# Altium PCB PCB1.PcbDoc
Units mil, origin at the board's own origin, x right, y up, seen from the top; angles counter-clockwise.
Board outline 3520 x 3190 mil, 2 copper layers (Top Layer, Bottom Layer); 34 components, 32 nets, 137 pads, 1 vias.
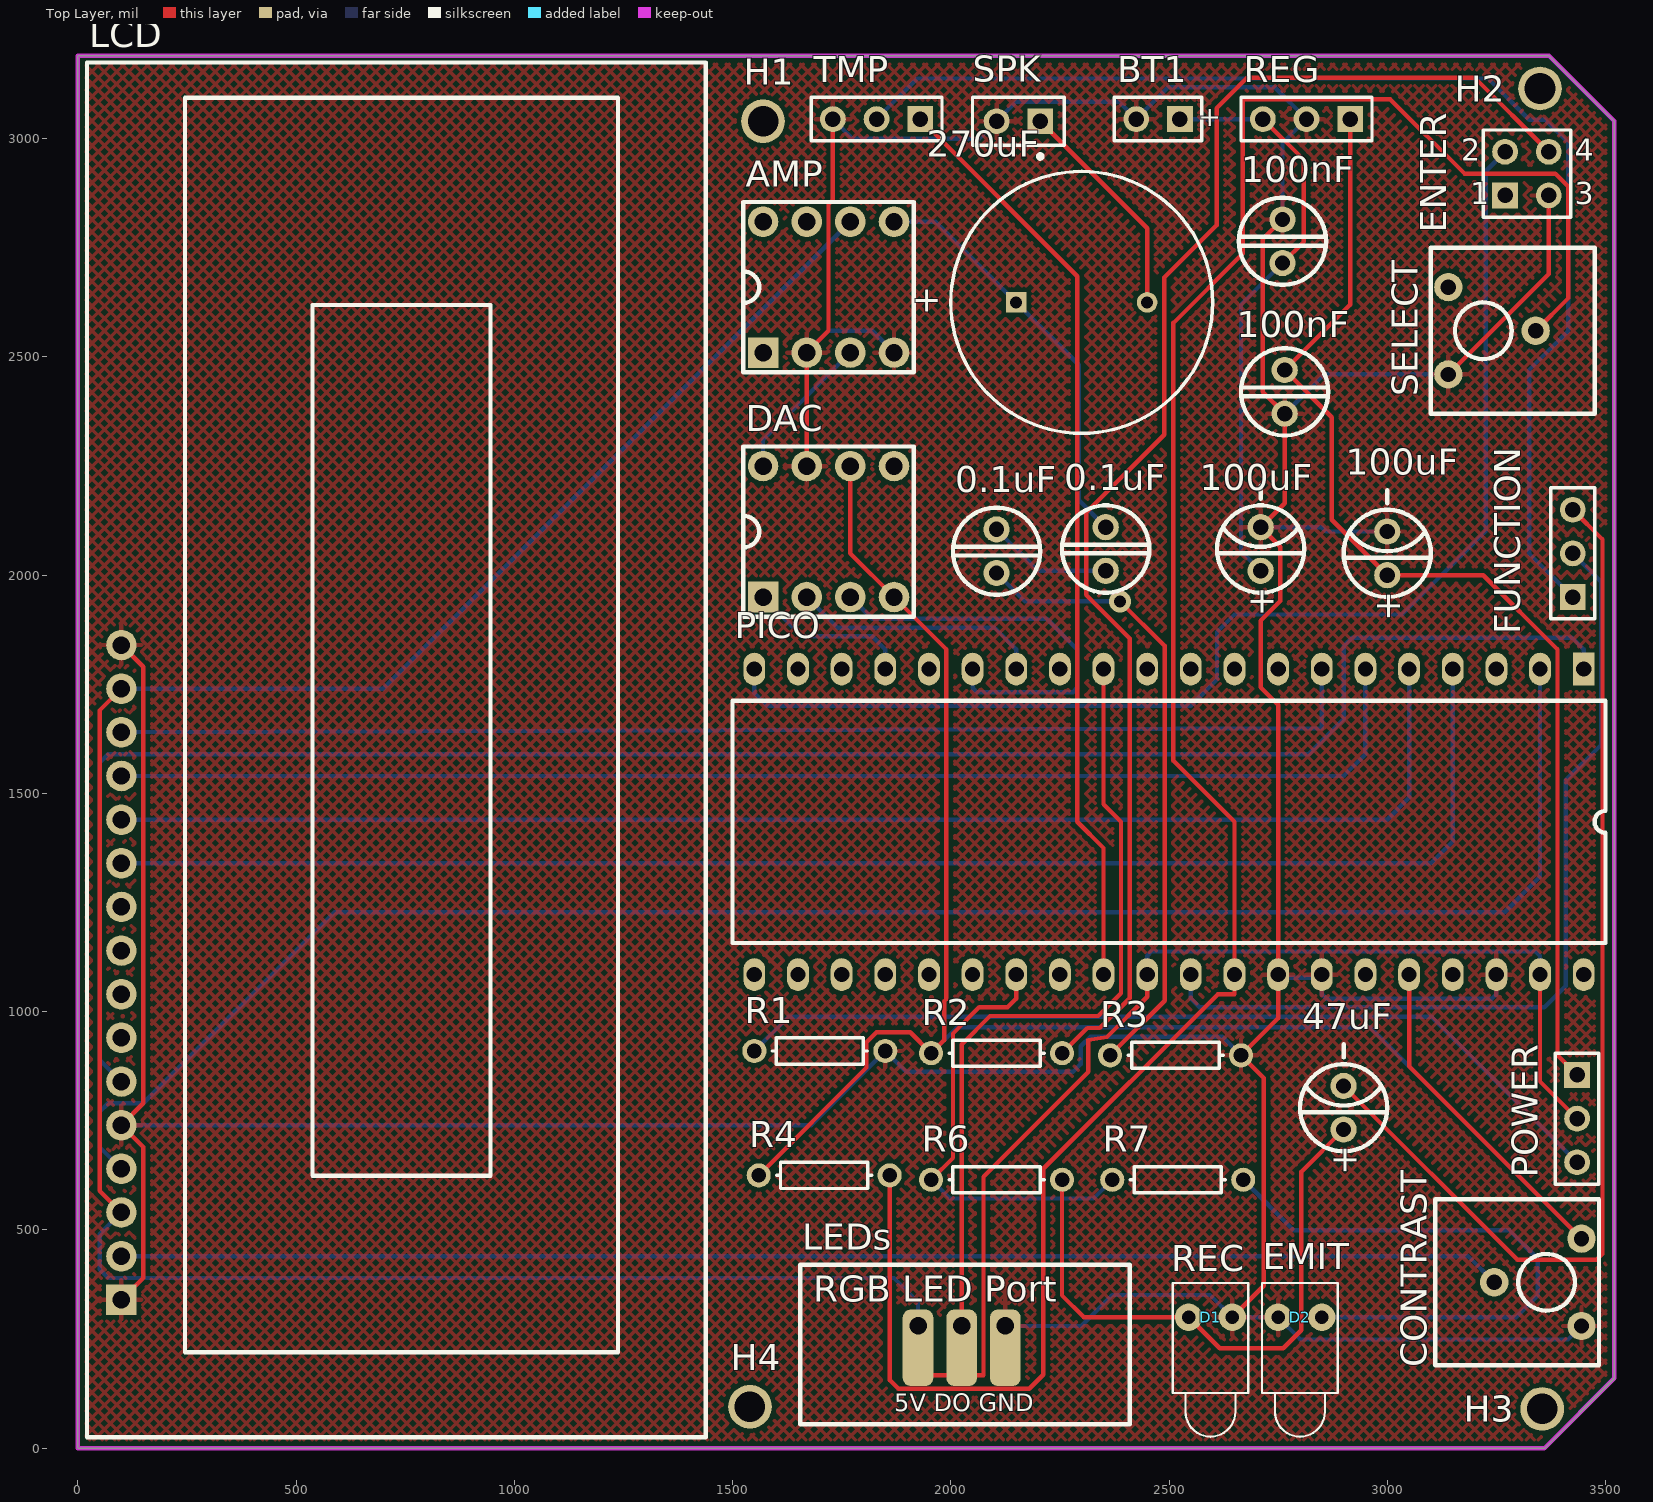
[diagram p0: Top Layer view]
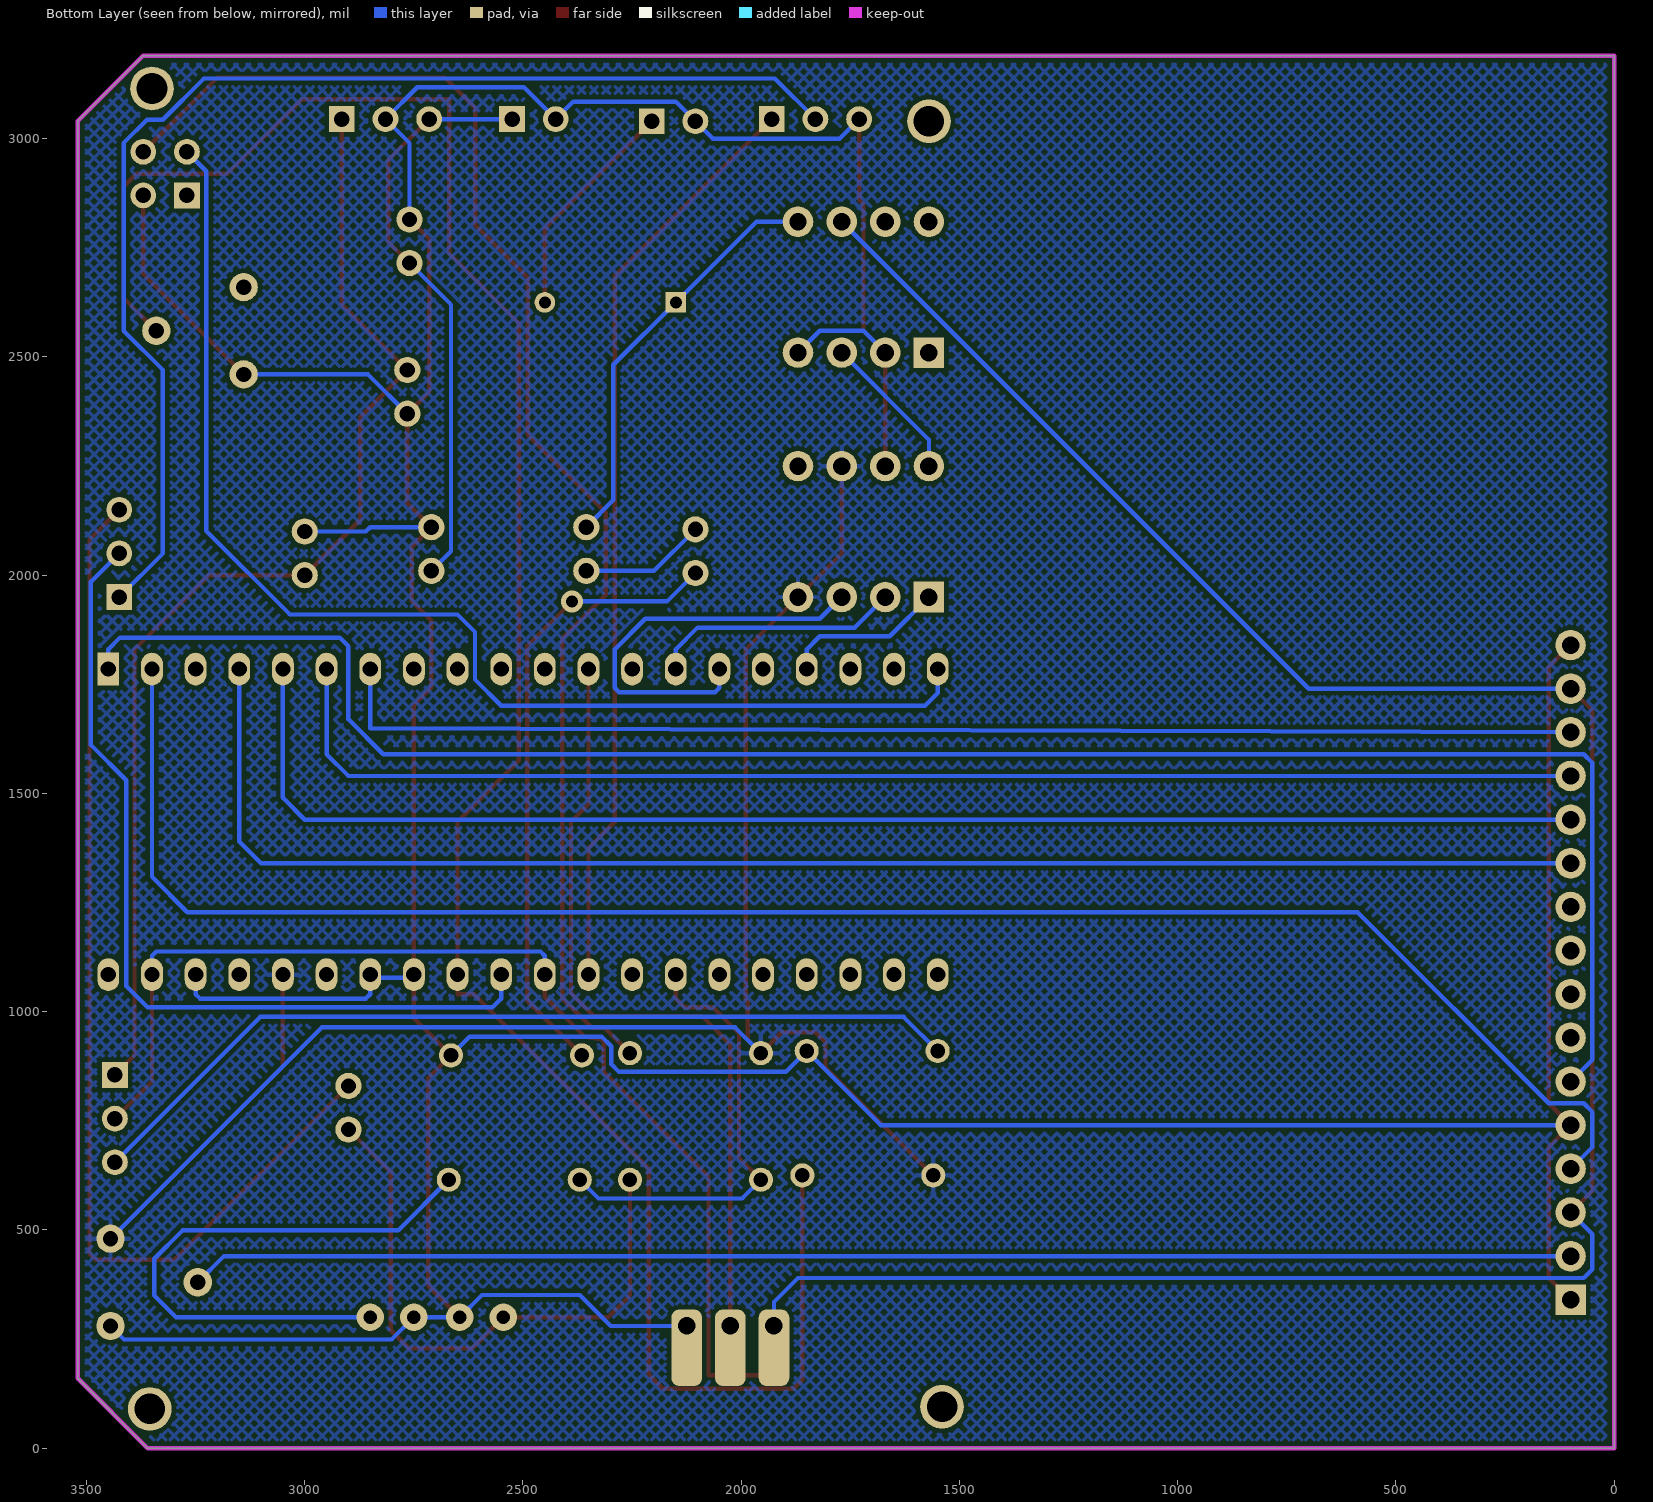
[diagram p1: Bottom Layer view, seen from below]

## Layer stack, top to bottom
Top Solder: solder mask 0.4, Solder Resist, Dk 3.5
Top Layer: signal copper 1.4
Dielectric 1: dielectric 12.6, FR-4, Dk 4.8
Bottom Layer: signal copper 1.4
Bottom Solder: solder mask 0.4, Solder Resist, Dk 3.5

## Board outline
0,0 0,3190 3370.63,3190 3520,3040.63 3520,160 3360,0

## Design rules (kind name [scope] priority, off if disabled: settings)
Clearance [All] p1: gap=10 ignorepadtopadclearanceinfootprint=FALSE except(0: Arc-Hole Track-Hole SMDPad-Hole THPad-Hole Via-Hole Fill-Hole Poly-Hole Region-Hole Text-Hole)
PolygonConnect [All] p1: connectstyle=Relief reliefconductorwidth=10 reliefentries=4 polygonreliefangle="90 Angle" airgapwidth=10
RoutingVias [All] p1: holewidth=28 width=50 viastyle="Through Hole" minholewidth=28 minwidth=50 maxholewidth=28 maxwidth=50
SolderMaskExpansion [All] p1: expansion=4 istentingtop=FALSE
Width [All] p1: maxlimit=10 minlimit=10 preferedwidth=10
30 further rules are at their usual default settings.

## Classes and differential pairs
component class Sheet2: 0.1uF 47uF 100nF 100uF 270uF AMP BT1 CONTRAST D1 D2 DAC ENTER FUNCTION H1 H2 H3 H4 LCD LEDs PICO POWER R1 R2 R3 R4 R6 R7 REG SELECT SPK TMP

## Components (designator, comment, footprint, x,y, rotation, side; value= is the part's Value field where it differs from the comment)
0.1uF "NP Cap" "NP Cap - Small" 2105,2105 r270 top (schematic designator 0.1uF_2)
0.1uF "NP Cap" "NP Cap - Small" 2355,2110 r270 top (schematic designator 0.1uF_1)
47uF "P Cap" "P Cap - Small" 2900,730 r90 top
100nF "NP Cap" "NP Cap - Small" 2765,2370 r90 top (schematic designator 100nF_2)
100nF "NP Cap" "NP Cap - Small" 2760,2815 r270 top (schematic designator 100nF_1)
100uF "P Cap" "P Cap - Small" 3000,2000 r90 top (schematic designator 100uF_2)
100uF "P Cap" "P Cap - Small" 2710,2010 r90 top (schematic designator 100uF_1)
270uF "Cap Pol1" RB7.6-15 2300,2625 r180 top value=270uF
AMP "LM386" 8DIP 1570,2510 r90 top
BT1 "Battery" BAT-2 2475,3045 r180 top
CONTRAST "RPot_3" "POT OFFSET 200" 3445,280 r90 top value=10K
D1 "REC" LED-1 2595,300 r270 top
D2 "EMIT" LED-1 2800,300 r270 top
DAC "LTC1661" 8DIP 1570,1950 r90 top
ENTER "BUTTON" HDR2X2 3270,2870 r0 top (schematic designator BUTTON)
FUNCTION "FUNC" HDR1X3 3425,1950 r90 top (schematic designator SWITCH2)
H1 "Hole 3mm" "Hole 3mm" 1960,2865 r0 top
H2 "Hole 3mm" "Hole 3mm" 3740,2940 r0 top
H3 "Hole 3mm" "Hole 3mm" 3530,480 r90 top
H4 "Hole 3mm" "Hole 3mm" 1930,-80 r0 top
LCD "LCD 44780" "OLED 16x2" 100,340 r90 top
LEDs "LEDs" "RGB LED Port" 1925,275 r0 top
PICO "Raspberry Pi Pico" "Raspberry Pi Pico" 3450,1785 r270 top
POWER "PWR" HDR1X3 3435,855 r270 top (schematic designator SWITCH1)
R1 "1K" AXIAL-0.3 1700,910 r180 top value=1k
R2 "Res1" AXIAL-0.3 2105,905 r180 top value=10K
R3 "Res1" AXIAL-0.3 2515,900 r180 top value=1K
R4 "Res1" AXIAL-0.3 1710,625 r0 top value=1MEG
R6 "10K" AXIAL-0.3 2105,615 r180 top value=10k
R7 "330" AXIAL-0.3 2520,615 r180 top
REG "VREG" HDR1X3 2915,3045 r180 top (schematic designator REGULATOR)
SELECT "RPot_3" "POT OFFSET 200" 3140,2660 r270 top value=10K (schematic designator R5)
SPK "Speaker" PIN2 2205,3040 r180 top
TMP "TMP" HDR1X3 1930,3045 r180 top

## Footprints (in the part's own frame and the unit in brackets; to place one, negate y for a bottom-side part, rotate by r counter-clockwise, add the part's x,y. Pads: shape width x height; smd on the part's side, far side on the other; paste and mask are expansions set on the pad)
8DIP [mil]
  rect 70x70 hole 40: 1(0,0)
  round 70 hole 40: 2(0,-100) 3(0,-200) 4(0,-300) 5(300,-300) 6(300,-200) 7(300,-100) 8(300,0)
  silkscreen extent -45,-345 345,45
AXIAL-0.3 [mm] "Axial Device, Thru-Hole; 2 Leads; 0.3 in Pin Spacing"
  round 1.4 hole 0.85: 1(-3.81,0) 2(3.81,0)
  silkscreen extent -2.77,-0.76 2.77,0.76
BAT-2 [mm] "Battery; 2 Leads"
  rect 1.5x1.5 hole 0.9: 1(-1.27,0)
  round 1.5 hole 0.9: 2(1.27,0)
  silkscreen extent -2.54,-1.27 2.54,1.27
HDR1X3 [mm] "Connector; Header; 3 Position"
  rect 1.5x1.5 hole 0.9: 1(0,0)
  round 1.5 hole 0.9: 2(2.54,0) 3(5.08,0)
  silkscreen extent -1.27,-1.27 6.35,1.27
HDR2X2 [mm] "Connector; Header; 2x2 Position"
  rect 1.5x1.5 hole 0.9: 1(0,0)
  round 1.5 hole 0.9: 2(0,2.54) 3(2.54,0) 4(2.54,2.54)
  silkscreen extent -1.27,-1.27 3.81,3.81
"Hole 3mm" [mil]
  round 100 hole 70: 1(-390,175)
LED-1 [mm] "LED; 2 Leads"
  round 1.6 hole 0.8: 1(0,1.27) 2(0,-1.27)
  silkscreen extent -2,-2.2 6.95,2.2
"NP Cap - Small" [mil]
  round 60 hole 35: 1(0,0) 2(100,0)
  silkscreen extent -50,-100 150,100
"OLED 16x2" [mil]
  rect 70x70 hole 40: 1(0,0)
  round 70 hole 40: 2(100,0) 3(200,0) 4(300,0) 5(400,0) 6(500,0) 7(600,0) 8(700,0) 9(800,0) 10(900,0) 11(1000,0) 12(1100,0) 13(1200,0) 14(1300,0) 15(1400,0) 16(1500,0)
  silkscreen extent -315,-1339 2835,79
"P Cap - Small" [mil]
  round 60 hole 35: 1(0,0) 2(100,0)
  silkscreen extent -50,-100 195,100
PIN2 [mm] "Photosensitive Diode; 2 Leads"
  rect 1.5x1.5 hole 0.9: 1(0,0)
  round 1.5 hole 0.9: 2(2.54,0)
  silkscreen extent -1.4,-1.4 3.94,2.17
"POT OFFSET 200" [mil]
  round 65 hole 35: 1(0,0) 2(100,200) 3(200,0)
  silkscreen extent -90,-40 290,335
"Raspberry Pi Pico" [mil]
  rect 75x50 hole 35: 1(0,0)
  oval 75x50 hole 35: 2(0,-100) 3(0,-200) 4(0,-300) 5(0,-400) 6(0,-500) 7(0,-600) 8(0,-700) 9(0,-800) 10(0,-900) 11(0,-1000) 12(0,-1100) 13(0,-1200) 14(0,-1300) 15(0,-1400) 16(0,-1500) 17(0,-1600) 18(0,-1700) 19(0,-1800) 20(0,-1900) 21(700,-1900) 22(700,-1800) 23(700,-1700) 24(700,-1600) 25(700,-1500) 26(700,-1400) 27(700,-1300) 28(700,-1200) 29(700,-1100) 30(700,-1000) 31(700,-900) 32(700,-800) 33(700,-700) 34(700,-600) 35(700,-500) 36(700,-400) 37(700,-300) 38(700,-200) 39(700,-100) 40(700,0)
  silkscreen extent 72,-1950 628,50
RB7.6-15 [mm] "Polarized Capacitor (Radial); 2 Leads"
  rect 1.2x1.2 hole 0.7: 1(3.81,0)
  round 1.2 hole 0.7: 2(-3.81,0)
  silkscreen extent -7.62,-7.62 7.62,7.62
"RGB LED Port" [mil]
  rrect50% 70x175 hole 40 copper offset 0,-50: 1(0,5) 2(100,5) 3(200,5)
  silkscreen extent -270,-220 485,145

## Part data
270uF: "Polarized Capacitor (Radial)", LatestRevisionDate=17-Jul-2002, LatestRevisionNote="Re-released for DXP Platform.", PackageDescription="Polarized Capacitor (Radial); 2 Leads", PackageReference=RB7.6-15, Published=8-Jun-2000, Publisher="Altium Limited"
BT1: "Multicell Battery", LatestRevisionDate=17-Jul-2002, LatestRevisionNote="Re-released for DXP Platform.", PackageDescription="Battery; 2 Leads", PackageReference=BAT-2, Published=24-Mar-1999, Publisher="Altium Limited"
CONTRAST SELECT: library part RPot, "Potentiometer", LatestRevisionDate=17-Jul-2002, LatestRevisionNote="Re-released for DXP Platform.", Published=8-Jun-2000, Publisher="Altium Limited", Set Position=0.5, Sim Note="Enter the Resistance value and the set point into parameter fields."
D1 D2: library part LED1, "Typical RED GaAs LED", LatestRevisionDate=08-Jul-2005, LatestRevisionNote="Mech Layer 1 removed.", PackageDescription="LED; 2 Leads", PackageReference=LED-1, Published=8-Jun-2000, Publisher="Altium Limited"
ENTER: library part "Header 2X2", "Header, 2-Pin, Dual row", LatestRevisionDate=17-Jul-2002, LatestRevisionNote="Re-released for DXP Platform.", Publisher="Altium Limited"
FUNCTION POWER REG TMP: library part "Header 3", "Header, 3-Pin", LatestRevisionDate=17-Jul-2002, LatestRevisionNote="Re-released for DXP Platform.", Publisher="Altium Limited"
LEDs: library part "RGB LED Header"
R1 R6 R7: library part Res1, "Resistor", LatestRevisionDate=17-Jul-2002, LatestRevisionNote="Re-released for DXP Platform.", PackageDescription="Axial Device, Thru-Hole; 2 Leads; 0.3 in Pin Spacing", PackageReference=AXIAL-0.3, Published=8-Jun-2000, Publisher="Altium Limited"
R2 R3 R4: "Resistor", LatestRevisionDate=17-Jul-2002, LatestRevisionNote="Re-released for DXP Platform.", PackageDescription="Axial Device, Thru-Hole; 2 Leads; 0.3 in Pin Spacing", PackageReference=AXIAL-0.3, Published=8-Jun-2000, Publisher="Altium Limited"
SPK: "Loudspeaker", LatestRevisionDate=17-Jul-2002, LatestRevisionNote="Re-released for DXP Platform.", PackageReference=PIN2, Published=24-Mar-1999, Publisher="Altium Limited"

## Via types
v1: diameter 50, hole 28, Top Layer to Bottom Layer, 1 vias

## Nets (pads, with @x,y where several pads share a name; then routed paths per layer and width w, separated by ;. In a path a pad name is that pad's centre, name@x,y a point inside that pad or via, vN(x,y) a via of type N, cw(c..) or ccw(c..) an arc to the next point about the centre after c; other vN are vias at no path point)
3V: CONTRAST.3 DAC.4 DAC.6 PICO.36 R2.2 R4.1 | length 4518.9
  Top Layer w10: R4.1 1807,872 1807,930 1830,953 1907,953 R2.2 1984.8,934.8 1984.8,1023.63 1990,1028.83 1990,1830 DAC.4 1770,2050 DAC.6 ; PICO.36 3050,875 CONTRAST.3
  Bottom Layer w10: R2.2 2014,964 2961,964 CONTRAST.3
5V: AMP.6 LCD.3 LCD.15 LEDs.1 PICO.30 PICO.39 POWER.2 | length 8181
  Top Layer w10: LCD.3 50,590 50,1690 LCD.15 ; LEDs.1 1925,167 2075,167 2075,622 2315,862 2315,935 2358,942 2450,1034 PICO.30 ; PICO.39 3350,840 POWER.2
  Bottom Layer w10: LCD.3 50,490 50,410 70,390 1870,390 1925,335 LEDs.1 ; LCD.15 700,1740 AMP.6 ; PICO.30 2450,1128 2460,1138 3340,1138 3350,1128 PICO.39
ADC_BOTH: FUNCTION.2 PICO.31 | length 1994.1
  Bottom Layer w10: PICO.31 2550,1030 2570,1010 3360,1010 3409,1059 3409,1530 3490,1611 3490,1985 FUNCTION.2
ADC_POT: PICO.32 R4.2 SELECT.2 | length 5281.4
  Top Layer w10: R4.2 1860,156 1880,136 2180,136 2212,168 2212,640 2612,1040 2650,1040 PICO.32 2650,1435 2510,1575 2510,2578 2669,2737 2669,3089 2670,3090 3007,3090 3177,2920 3385,2920 3415,2890 3415,2635 SELECT.2
DAC_CS: DAC.1 PICO.17 | length 374.7
  Bottom Layer w10: DAC.1 1660,1860 1820,1860 1850,1830 PICO.17
DAC_D: DAC.3 PICO.15 | length 949
  Bottom Layer w10: DAC.3 1820,1900 2220,1900 2290,1830 2290,1742 2280,1732 2060,1732 2050,1742 PICO.15
DAC_SCK: DAC.2 PICO.14 | length 574.7
  Bottom Layer w10: DAC.2 1740,1880 2100,1880 2150,1830 PICO.14
GND: 100nF.1 100uF.2 AMP.2 AMP.4 BT1.2 CONTRAST.1 D1.1 D2.2 DAC.7 ENTER.3 LCD.1 LCD.5 LCD.16 LEDs.3 PICO.33 PICO.34 PICO.38 R1.1 R3.1 REG.2 SELECT.3 SPK.2 TMP.3 | length 12783
  Top Layer w10: LCD.1 150,390 150,690 LCD.5 150,790 150,1790 LCD.16 ; DAC.7 AMP.2 1720,2560 1720,2850 1730,2860 TMP.3 ; D1.1 2717,372 2717,848 R3.1 2750,985 PICO.33 2750,1703 2710,1743 2710,1896 2755,1941 2755,2065 2710,2110 2765,2165 2765,2370 2715,2420 2715,2770 100nF.1@2760,2815 ; SELECT.3 3370,2690 ENTER.3
  Bottom Layer w10: LCD.5 1680,740 R1.1 1898,862 2280,862 2298,880 2298,921 2320,943 2622,943 R3.1 ; AMP.2 1720,2560 1820,2560 AMP.4 ; TMP.3 1775,3000 2065,3000 SPK.2 2150,3085 2385,3085 BT1.2 2498,3118 2742,3118 REG.2 2760,2990 100nF.1@2760,2815 ; LEDs.3 2299,280 2370,351 2594,351 D1.1 D2.2 2801,249 3414,249 CONTRAST.1 ; 100uF.2@2710,2110 2850,2110 2860,2100 100uF.2@3000,2100 ; PICO.33 2750,1077.5 PICO.34@2850,1077.5 ; 100nF.1@2765,2370 2855,2460 SELECT.3 ; PICO.34 PICO.34@2850,1077.5 ; PICO.38 3250,1040 3240,1030 2860,1030 2850,1040 PICO.34@2850,1077.5
HR_PWR: PICO.27 R6.2 R7.2 | length 1039.5
  Top Layer w10: R6.2 2005,665 2005,950 2065,1010 2130,1010 2150,1030 PICO.27
  Bottom Layer w10: R6.2 1998,572 2327,572 R7.2
LCD_E: LCD.6 PICO.1 | length 4423.6
  Bottom Layer w10: LCD.6 50,890 50,1570 70,1590 2820,1590 2900,1670 2900,1837 2920,1857 3423,1857 3450,1830 PICO.1
LCD_RS: LCD.4 PICO.2 | length 4150
  Bottom Layer w10: LCD.4 50,690 50,770 70,790 150,790 588,1228 3269,1228 3350,1309 PICO.2
LCD_VDD: CONTRAST.2 LCD.2 | length 3169.9
  Bottom Layer w10: LCD.2 3185,440 CONTRAST.2
Net0.1uF_1_1: 0.1uF.1@2355,2110 270uF.1 AMP.5 | length 956.5
  Bottom Layer w10: AMP.5 1965,2810 270uF.1 2293,2482 2293,2172 0.1uF.1@2355,2110
Net0.1uF_1_2: 0.1uF.1@2105,2105 0.1uF.2@2355,2010 | length 289.4
  Bottom Layer w10: 0.1uF.1@2105,2105 2200,2010 0.1uF.2@2355,2010
Net0.1uF_2_2: 0.1uF.2@2105,2005 R3.2 | length 1444
  Top Layer w10: R3.2 2490,1025 2490,1838 v1(2388,1940)
  Bottom Layer w10: 0.1uF.2@2105,2005 2170,1940 v1(2388,1940)
Net47uF_1: 47uF.1 D1.2 R6.1 | length 1380.3
  Top Layer w10: R6.1 2255,350 2305,300 D1.2 2616,229 2762,229 2803,270 2803,633 47uF.1
Net47uF_2: 47uF.2 FUNCTION.3 | length 2496.4
  Top Layer w10: 47uF.2 3298,432 3480,432 3493,445 3493,2082 FUNCTION.3
Net100nF_1_2: 100nF.2@2760,2715 100uF.1@2710,2010 BT1.1 REG.3 | length 1342.2
  Top Layer w10: REG.3 2809,2951 2809,2764 100nF.2@2760,2715
  Bottom Layer w10: BT1.1 REG.3 ; 100uF.1@2710,2010 2665,2055 2665,2620 100nF.2@2760,2715
Net100nF_2_2: 100nF.2@2765,2470 100uF.1@3000,2000 POWER.1 REG.1 | length 2658.5
  Top Layer w10: REG.1 2915,2620 2765,2470 2873,2362 2873,2127 3000,2000 3220,2000 3390,1830 3390,900 POWER.1
Net270uF_2: 270uF.2 SPK.1 | length 516.5
  Top Layer w10: SPK.1 2450,2795 270uF.2
NetAMP_3: AMP.3 DAC.8 | length 342.8
  Bottom Layer w10: DAC.8 1570,2310 AMP.3
NetBUTTON_2: ENTER.2 PICO.20 | length 2859.2
  Bottom Layer w10: PICO.20 1550,1730 1579,1701 2550,1701 2610,1761 2610,1870 2650,1910 3034,1910 3225.47,2101.47 3225.47,2925.47 ENTER.2
NetBUTTON_4: ENTER.4 R2.1 | length 3271.9
  Top Layer w10: R2.1 2312.56,962.56 2341.56,962.56 2410,1031 2410,1855 2310,1955 2310,2143 2489,2322 2489,2682 2609,2802 2609,3070 2679,3140 3200,3140 ENTER.4
NetD2_1: D2.1 R7.1 | length 1349.7
  Bottom Layer w10: R7.1 2786,499 3280,499 3345,434 3345,350 3295,300 D2.1
NetLCD_11: LCD.11 PICO.4 | length 3465.7
  Bottom Layer w10: LCD.11 3100,1340 3150,1390 PICO.4
NetLCD_12: LCD.12 PICO.5 | length 3265.7
  Bottom Layer w10: LCD.12 3000,1440 3050,1490 PICO.5
NetLCD_13: LCD.13 PICO.6 | length 3065.7
  Bottom Layer w10: LCD.13 2900,1540 2950,1590 PICO.6
NetLCD_14: LCD.14 PICO.7 | length 2886
  Bottom Layer w10: LCD.14 2850,1649 PICO.7
NetLEDs_2: LEDs.2 PICO.12 | length 1818
  Top Layer w10: LEDs.2 2025,925 2090,990 2338,990 2390,1042 2390,1435 2350,1475 PICO.12
NetR1_2: POWER.3 R1.2 | length 2055.2
  Bottom Layer w10: R1.2 1628,988 3102,988 POWER.3
NetSWITCH2_1: FUNCTION.1 TMP.2 | length 2803.5
  Bottom Layer w10: TMP.2 1923,3138 3231,3138 3325.47,3043.53 3361.47,3043.53 3415,2990 3415,2560 3325,2470 3325,2050 FUNCTION.1
TMP_PWR: PICO.29 TMP.1 | length 2134
  Top Layer w10: TMP.1 2290,2685 2290,1435 2350,1375 PICO.29
pads on no net: AMP.1 AMP.7 AMP.8 DAC.5 ENTER.1 H1.1 H2.1 H3.1 H4.1 LCD.7 LCD.8 LCD.9 LCD.10 PICO.3 PICO.8 PICO.9 PICO.10 PICO.11 PICO.13 PICO.16 PICO.18 PICO.19 PICO.21 PICO.22 PICO.23 PICO.24 PICO.25 PICO.26 PICO.28 PICO.35 PICO.37 PICO.40 SELECT.1

## Polygon pours and split planes (outlines as drawn)
GND on Top Layer "GND_L01_P000" (hatched 45Degree grid 20 track 8, pour order 0): 0,0 0,3190 3370.63,3190 3520,3040.63 3520,160 3360,0
3V on Bottom Layer "3V_L02_P001" (hatched 45Degree grid 20 track 8, pour order 1): 0,0 0,3190 3370.63,3190 3520,3040.63 3520,160 3360,0

## Keep-outs
Keep-Out Layer:
  the board outline again, w10

## Text inside footprints (layer, text, board x,y; h text height)
47uF: Top Overlay "+" at 2930,625 h60 r90
100uF: Top Overlay "+" at 2740,1905 h60 r90
100uF: Top Overlay "+" at 3030,1895 h60 r90
270uF: Top Overlay "+" at 1979.85,2654.01 h59.06 r180
BT1: Top Overlay "+" at 2619.49,3067.72 h45.28 r180
ENTER: Top Overlay "1" at 3190,2850 h50; Top Overlay "2" at 3170,2950 h50; Top Overlay "4" at 3430,2950 h50; Top Overlay "3" at 3430,2850 h50
LEDs: Top Overlay "RGB LED Port" at 1685,335 h60; Top Overlay "5V DO GND" at 1870,85 h40